# Altium PCB DongleCopy.PcbDoc
Units mm, origin at the board's own origin, x right, y up, seen from the top; angles counter-clockwise.
Board outline 69.72 x 43.31 mm, 2 copper layers (Top Layer, Bottom Layer); 39 components, 34 nets, 175 pads, 43 vias.
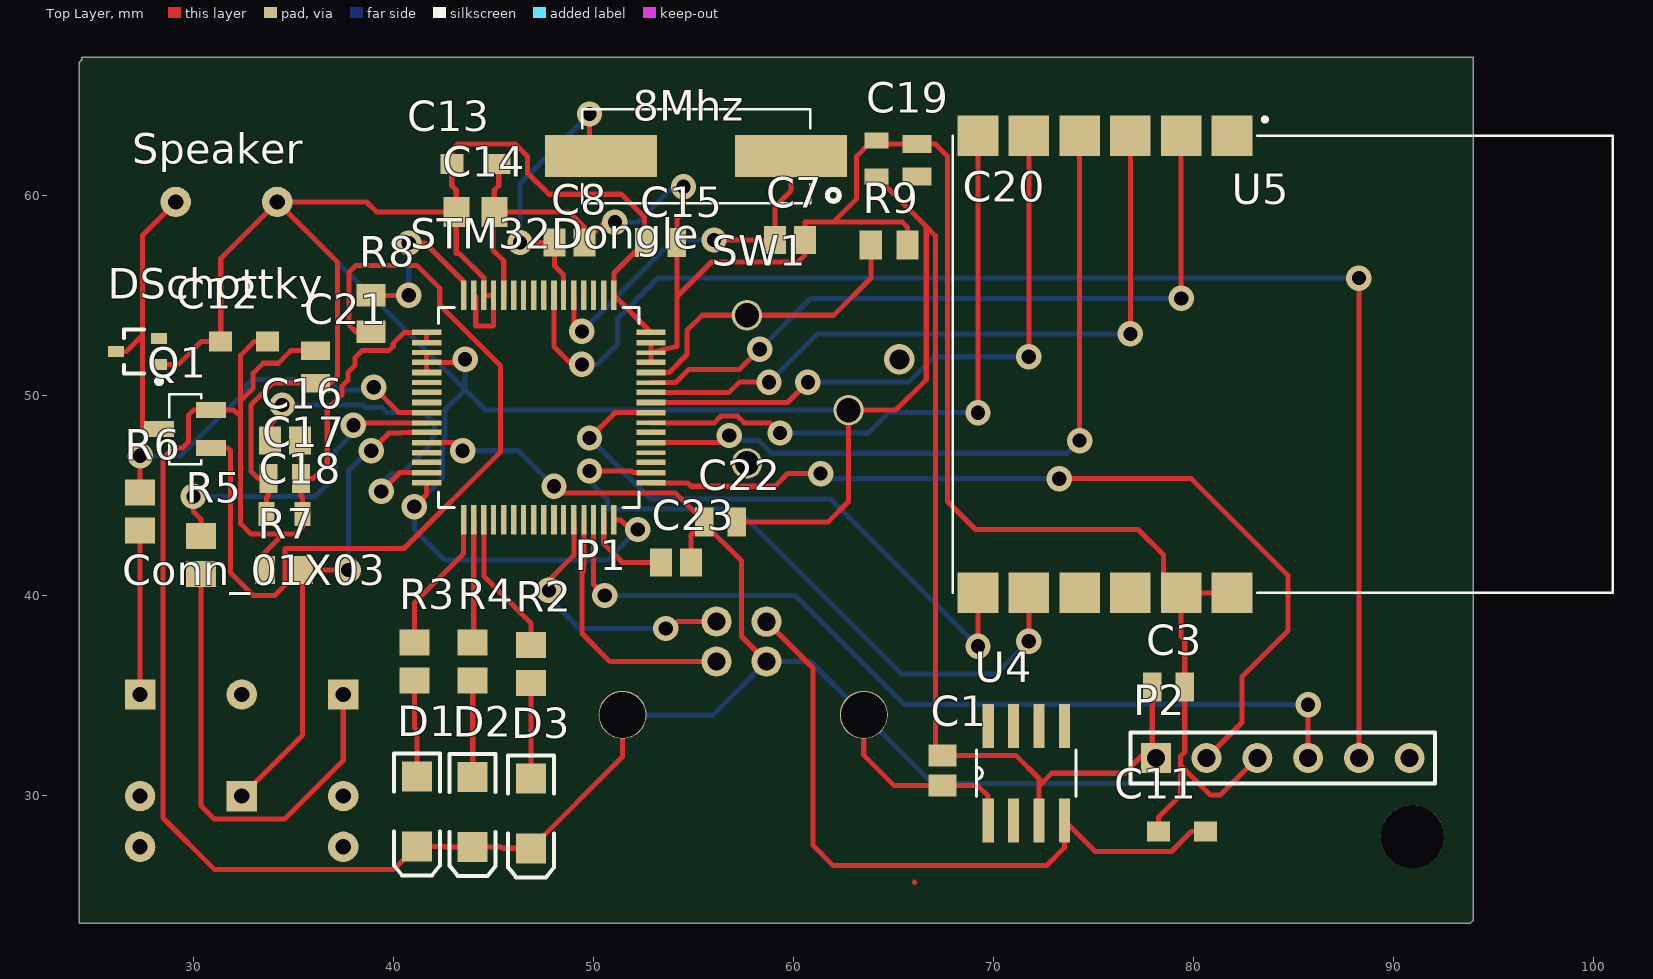
[diagram p0: Top Layer view]
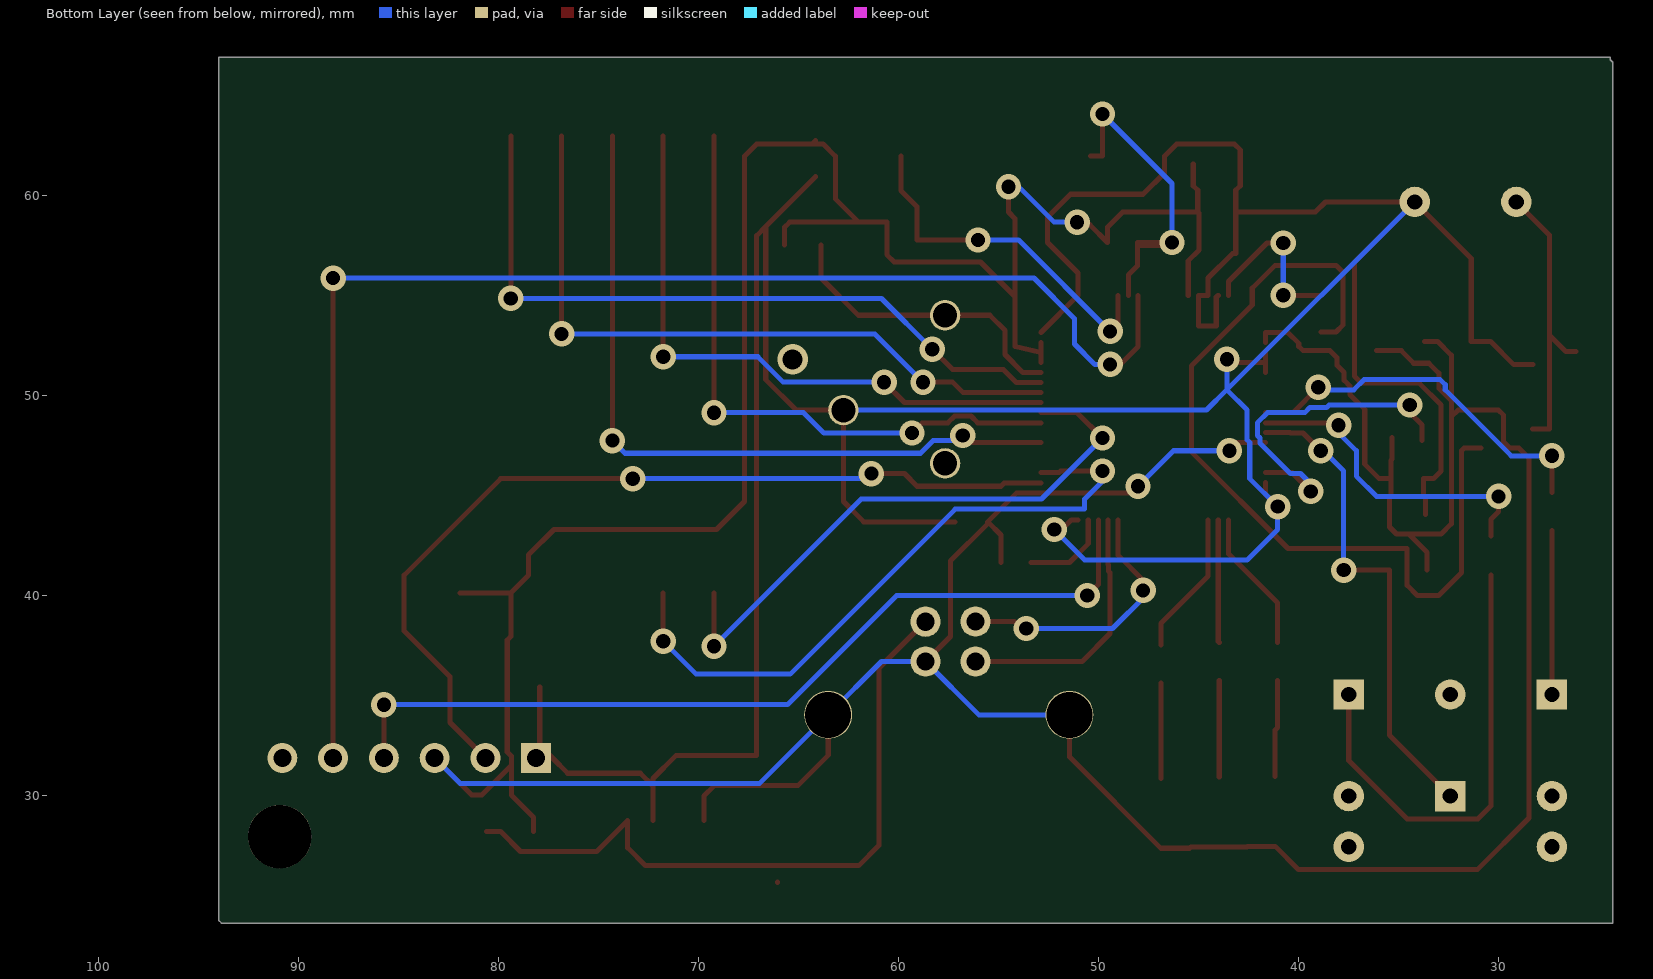
[diagram p1: Bottom Layer view, seen from below]

## Layer stack, top to bottom
Top Solder: solder mask 0.0102, Solder Resist, Dk 3.5
Top Layer: signal copper 0.0356
Dielectric 1: dielectric 0.32, FR-4, Dk 4.8
Bottom Layer: signal copper 0.0356
Bottom Solder: solder mask 0.0102, Solder Resist, Dk 3.5

## Board outline
24.384,66.802 24.257,66.675 24.257,23.622 93.853,23.622 93.98,23.749 93.98,66.929 24.384,66.929

## Design rules (kind name [scope] priority, off if disabled: settings)
Clearance [All] p1: gap=0.215
ComponentClearance [All] p1: gap=0.22 collisioncheckmode=3 verticalgap=0.22 showdistances=TRUE
HoleToHoleClearance [All] p1: gap=0.24 allowstackedmicrovias=TRUE
MinimumSolderMaskSliver [All] p1: minsoldermaskwidth=0.209
PolygonConnect [All] p1: connectstyle=Relief reliefconductorwidth=0.254 reliefentries=4 polygonreliefangle="90 Angle" airgapwidth=0.254
RoutingVias [All] p1: holewidth=0.711 width=1.27 viastyle="Through Hole" minholewidth=0.711 minwidth=1.27 maxholewidth=0.711 maxwidth=1.27
SilkToSilkClearance [All] p1: silktosilkclearance=0.24
SilkToSolderMaskClearance [IsPad] p1: minsilkscreentomaskgap=0.125 clearancetoexposedcopper=TRUE
SolderMaskExpansion [All] p1: expansion=0.102
Width [All] p1: maxlimit=0.254 minlimit=0.254 preferedwidth=0.254
25 further rules are at their usual default settings.

## Components (designator, comment, footprint, x,y, rotation, side; value= is the part's Value field where it differs from the comment)
8Mhz "X1" XTAL_ABLS2-24.000MHZ-D4YF-T 55.118,61.976 r180 top
C1 "Cap Pol3" C0805 67.437,31.242 r270 top
C3 "100nF" CAPC2013X110N 78.74,35.433 r0 top
C7 "15pF" C0805 59.817,57.785 r0 top
C8 "Cap Pol3" C0805 48.78,57.658 r0 top
C11 "1uF" INDC2012X87N 79.407,28.194 r0 top
C12 "1uF" INDC2012X87N 32.512,52.705 r0 top
C13 "1uF" INDC2012X87N 44.069,61.595 r0 top
C14 "10nF" CAPC2012X135N 44.069,59.182 r0 top
C15 "100nf" CAPC2013X110N 53.34,57.658 r0 top
C16 "Cap Pol3" C0805 34.544,47.752 r0 top
C17 "100nF" CAPC2013X110N 34.544,45.847 r0 top
C18 "4.7uF" 0805 34.533,44.069 r0 top
C19 "4.7uF" 0805 64.135,61.849 r90 top
C20 "100nF" CAPC2013X110N 66.167,61.773 r90 top
C21 "100nF" CAPC2013X110N 36.068,51.435 r270 top
C22 "100nF" CAPC2013X110N 56.337,43.688 r180 top
C23 "Cap Pol3" C0805 54.114,41.656 r0 top
Conn_01X03 "K1" PCBComponent_1#1 26.289,25.527 r90 top
D1 "LED2" 3.2X1.6X1.1 41.148,29.21 r270 top
D2 "LED2" 3.2X1.6X1.1 43.942,29.182 r270 top
D3 "LED2" 3.2X1.6X1.1 46.863,29.111 r270 top
DSchottky "D4" SOT65P210X110-3N 27.178,52.197 r180 top
P1 "USB_B" PCBComponent_1#2 43.18,30.226 r0 top
P2 "Header 6" HDR1X6 78.105,31.877 r0 top
Q1 "BC846A-7-F" SOT23-3 29.511,47.971 r90 top
R2 "100R" RESC2012X60 46.863,36.576 r270 top
R3 "100R" RESC2012X60 41.021,36.703 r270 top
R4 "100R" RESC2012X60 43.942,36.703 r270 top
R5 "100ohm" RESC2012X60 30.353,42.037 r270 top
R6 "100ohm" RESC2012X60 27.305,44.196 r270 top
R7 "2.2kr" RESC2013X65N 34.493,41.275 r0 top
R8 "1k" CAPC2012X140N 38.862,54.102 r90 top
R9 "1k" CAPC2012X140N 64.77,57.531 r180 top
Speaker "Speaker" Speaker 36.703,59.69 r180 top
STM32Dongle "U1" QFP50P1200X1200X160-64N 47.244,49.403 r270 top
SW1 "YELSW" PCBComponent_1#3 43.688,44.196 r0 top
U4 "LD1117D33TR" SOIC127P600X175-8N 71.628,31.115 r90 top
U5 "MRF24J40MDT-I/RM" XCVR_MRF24J40MDT-I/RM 75.565,51.562 r270 top

## Footprints (in the part's own frame and the unit in brackets; to place one, negate y for a bottom-side part, rotate by r counter-clockwise, add the part's x,y. Pads: shape width x height; smd on the part's side, far side on the other; paste and mask are expansions set on the pad)
3.2X1.6X1.1 [mm] "SMT LED; 2 Flat Leads"
  rect 1.5x1.5 smd: 1(-1.75,0) 2(1.75,0)
  silkscreen extent -2.9,-1.15 3.2,1.15
0805 [mm]
  rect 0.8x1.2 smd: P1(-0.9,0) P2(0.9,0)
C0805 [mm] "Chip Capacitor, Body 2.0x1.3mm, IPC High Density"
  rect 1.1x1.4 smd: 1(-0.75,0) 2(0.75,0)
  body extent -1.1,-0.72 1.1,0.72, height 1.4
CAPC2012X135N [mm]
  rect 1.3x1.5 smd: 1(-0.95,0) 2(0.95,0)
CAPC2012X140N [mil]
  rect 44x57 smd: 1(-36,0) 2(36,0)
CAPC2013X110N [mil]
  rect 36x57 smd: 1(-32,0) 2(32,0)
HDR1X6 [mm] "Connector; Header; 6 Position"
  rect 1.5x1.5 hole 0.9: 1(0,0)
  round 1.5 hole 0.9: 2(2.54,0) 3(5.08,0) 4(7.62,0) 5(10.16,0) 6(12.7,0)
  silkscreen extent -1.27,-1.27 13.97,1.27
INDC2012X87N [mm]
  rect 1.15x1 smd: 1(-1.175,0) 2(1.175,0)
PCBComponent_1#1 [mil]
  round 60 hole 30: 4(375,-240) 6(175,-440) 7(75,-440) 11(75,-40) 12(175,-40)
  rect 60x60 hole 30: R3(375,-40) S1(175,-240) T2(375,-440)
PCBComponent_1#2 [mil]
  round 60 hole 36.22: 1(608.43,333.62) 2(510,333.74) 3(510,255) 4(608.43,255)
  round 94.49 hole 90.55: 5(325,150) 5(800,150)
  Top Layer lines w10: 900,-179.45 900.28,-179.72
PCBComponent_1#3 [mil]
  round 60 hole 48.03: 1(550,386.73) 3(750,200) 7(550,95)
  round 60 hole 39.37: 10(850,300)
QFP50P1200X1200X160-64N [mil]
  rect 58x11 smd: 1(-221,148) 2(-221,128) 4(-221,89) 5(-221,69) 7(-221,30) 8(-221,10) 9(-221,-10) 11(-221,-49) 12(-221,-69) 14(-221,-108) 15(-221,-128) 16(-221,-148) 33(221,-148) 34(221,-128) 35(221,-108) 37(221,-69) 38(221,-49) 40(221,-10) 41(221,10) 42(221,30) 44(221,69) 47(221,128) 48(221,148)
  rect 58x9.45 smd: 3(-221,108)
  rect 58x10 smd: 6(-221,49) 36(221,-89) 39(221,-30) 43(221,49) 45(221,89) 46(221,108)
  rect 58x9.84 smd: 10(-221,-30) 13(-221,-89)
  rect 11x58 smd: 17(-148,-221) 18(-128,-221) 20(-89,-221) 21(-69,-221) 23(-30,-221) 24(-10,-221) 25(10,-221) 27(49,-221) 28(69,-221) 30(108,-221) 31(128,-221) 32(148,-221) 49(148,221) 50(128,221) 51(108,221) 53(69,221) 54(49,221) 56(10,221) 57(-10,221) 58(-30,221) 60(-69,221) 61(-89,221) 63(-128,221) 64(-148,221)
  rect 9.84x58 smd: 19(-108,-221) 22(-49,-221)
  rect 10x58 smd: 26(30,-221) 29(89,-221)
  rect 9.45x58 smd: 52(89,221) 59(-49,221) 62(-108,221)
  rect 9.06x58 smd: 55(30,221)
  silkscreen extent -197,-197 197,197
RESC2012X60 [mm]
  rect 1.3x1.5 smd: 1(-0.95,0) 2(0.95,0)
RESC2013X65N [mil]
  rect 40x55 smd: 1(-37,0) 2(37,0)
SOIC127P600X175-8N [mil]
  rect 86x22 smd: 1(-93,75) 2(-93,25) 3(-93,-25) 4(-93,-75) 5(93,-75) 6(93,-25) 7(93,25) 8(93,75)
  silkscreen extent -46,-98 46,99
SOT23-3 [mm]
  rect 0.8x1.5 smd: 1(-0.6,-1.35) 2(1.3,-1.35) 3(0.35,1.25)
  silkscreen extent -1.4,-0.85 2.1,0.75
SOT65P210X110-3N [mm] "SOT23, 3-Leads, Body 2.00x2.10mm, Pitch 0.65mm, IPC Medium Density"
  rect 0.8x0.55 smd: 1(-1.075,0.65) 2(-1.075,-0.65) 3(1.075,0)
  silkscreen extent -1.2,-1.1 0.67,1.6, body extent -0.67,-1.1 0.67,1.1, height 1.1
Speaker [mil]
  round 60 hole 30: 1(100,0) 2(300,0)
XCVR_MRF24J40MDT-I/RM [mil]
  rect 80x80 smd: 1(-450,250) 2(-450,150) 3(-450,50) 4(-450,-50) 5(-450,-150) 6(-450,-250) 7(450,-250) 8(450,-150) 9(450,-50) 10(450,50) 11(450,150) 12(450,250)
  silkscreen extent -486,-300 450,1000
XTAL_ABLS2-24.000MHZ-D4YF-T [mm]
  rect 5.6x2.1 smd: 1(-4.75,0) 2(4.75,0)
  silkscreen extent -7.15,-2.35 5.7,2.35

## Part data
8Mhz: library part 8Mhz
C1 C8 C16 C23: "Polarized Capacitor (Surface Mount)"
C3 C15 C17 C20 C21 C22: library part C0805C104K5RACTU, "Capacitor; Ceramic; Cap; .100UF ; Tol+-10%; SMD; Vol-Rtg 50V; X7R, Tape/Reel"
C7: library part "Cap Pol3", "Polarized Capacitor (Surface Mount)"
C11 C12 C13: library part C2012X5R1E105M085AC, "CAP CER 1UF 25V X5R 0805"
C14: library part GRM216R71H103KA01D, "CAP CER 10000PF 50V X7R 0805"
Conn_01X03: library part Conn_01X03
D1 D2 D3: "Typical RED, GREEN, YELLOW, AMBER GaAs LED"
DSchottky: library part DSchottky
P1 Speaker: library part Component_1
P2: "Header, 6-Pin"
Q1: "TRANS NPN 65V 0.1A SOT23-3"
R2 R3 R4 R5 R6: library part RC0805FR-07100RL, "RES SMD 100 OHM 1% 1/8W 0805"
R7: library part RC0805FR-072K2L, "RES SMD 2.2K OHM 1% 1/8W 0805"
R8 R9: library part 1kohm, "1276-5272-1-ND"
STM32Dongle: library part STM32Dongle, "497-11907-ND"
U4: "IC REG LINEAR 3.3V 800MA 8SO"
U5: "2.4 GHz IEEE 802.15.4 Certified Transceiver Module (+20 dBm), 12 MODULE Varies T/R"

## Free pads (board coordinates)
  round 3.175 hole 3.175 unplated: 2(90.932,27.94)

## Via types
v1: diameter 1.27, hole 0.711, Top Layer to Bottom Layer, 43 vias

## Nets (pads, with @x,y where several pads share a name; then routed paths per layer and width w, separated by ;. In a path a pad name is that pad's centre, name@x,y a point inside that pad or via, vN(x,y) a via of type N, cw(c..) or ccw(c..) an arc to the next point about the centre after c; other vN are vias at no path point)
3.3V: C1.1 C3.1 C12.1 C13.1 C14.1 C15.1 C17.1 C18.P1 C19.P1 C21.2 C22.1 DSchottky.1 P2.1 Speaker.1 STM32Dongle.1 STM32Dongle.13 STM32Dongle.14 STM32Dongle.15 STM32Dongle.19 STM32Dongle.20 STM32Dongle.21 STM32Dongle.32 STM32Dongle.48 STM32Dongle.64 SW1.3 U4.3 | length 203.8
  Top Layer w0.254: DSchottky.1 29.21,51.547 30.368,52.705 C12.1 31.337,56.864 Speaker.1 ; C18.P1 33.633,44.907 33.731,45.005 C17.1 33.223,45.847 32.842,46.228 32.842,49.53 33.934,50.622 C21.2 36.83,50.622 37.186,50.978 37.186,56.667 Speaker.1 ; v1@41.148,44.577 41.631,45.06 STM32Dongle.32 ; STM32Dongle.21 STM32Dongle.20 ; STM32Dongle.19 STM32Dongle.20 ; v1@43.129,51.664 STM32Dongle.20 ; STM32Dongle.15 44.005,55.016 44.094,54.927 44.094,53.492 44.983,53.492 STM32Dongle.13 STM32Dongle.14 44.501,55.88 43.282,57.099 43.119,57.099 C14.1 ; STM32Dongle.48 51.333,43.79 v1@51.689,43.434 ; STM32Dongle.64 STM32Dongle.1 51.003,56.134 C15.1 52.527,58.928 51.384,60.071 47.752,60.071 46.685,61.138 46.685,61.976 46.082,62.579 43.18,62.579 42.894,62.293 C13.1 42.894,60.499 43.119,60.274 C14.1 ; C22.1 61.722,43.688 62.738,44.704 SW1.3 65.1,49.276 66.624,50.8 66.624,58.46 ; C19.P1 66.624,58.46 ; U4.3 72.263,30.48 ; C3.1 77.927,32.512 77.292,31.877 ; P2.1 77.292,31.877 ; Speaker.1 38.633,59.69 39.141,59.182 C14.1 ; 66.624,58.46 67.081,58.003 67.081,31.992 C1.1 71.12,31.992 72.263,30.849 72.263,30.48 ; 72.263,30.48 72.898,31.115 76.53,31.115 77.292,31.877
  Bottom Layer w0.254: Speaker.1 43.561,50.292 ; v1(43.561,51.816) 43.561,50.292 ; v1(52.197,43.307) 50.673,41.783 42.545,41.783 41.021,43.307 v1(41.021,44.45) 42.418,45.847 42.418,47.665 42.545,47.792 42.545,49.276 43.561,50.292 ; SW1.3 44.577,49.276 43.561,50.292
5V: C11.2 P1.1 U4.4 | length 35
  Top Layer w0.254: P1.1 60.96,36.374 60.96,27.508 61.976,26.492 72.644,26.492 73.533,27.381 U4.4 75.082,27.203 78.892,27.203 79.883,28.194 C11.2
GND: C1.2 C3.2 C7.2 C8.2 C11.1 C12.2 C13.2 C14.2 C15.2 C16.2 C17.2 C18.P2 C19.P2 C20.2 C21.1 C22.2 C23.2 D1.2 D2.2 D3.2 P1.4 P1.5 P2.3 Q1.2 R7.1 R9.1 STM32Dongle.12 STM32Dongle.17 STM32Dongle.18 STM32Dongle.28 STM32Dongle.61 STM32Dongle.62 STM32Dongle.63 U4.1 U5.11 U5.12 | length 265.9
  Top Layer w0.254: 32.334,49.754 32.334,52.019 33.02,52.705 C12.2 ; R7.1 33.553,42.164 34.468,43.078 ; C16.2@35.294,47.904 C16.2 35.294,46.824 35.357,46.761 C17.2 ; C21.1 34.842,52.248 34.215,51.621 33.46,51.621 32.961,51.122 32.961,50.367 32.334,49.74 32.334,48.941 ; STM32Dongle.28 43.028,47.65 v1(43.434,47.244) ; STM32Dongle.18 STM32Dongle.17 40.513,53.162 39.967,52.616 39.967,52.471 39.744,52.248 38.405,52.248 38.052,51.895 38.052,51.514 37.694,51.156 37.694,50.767 37.398,50.472 37.398,50.048 36.665,49.314 36.665,46.571 35.941,45.847 C17.2 ; C13.2 45.244,60.499 45.019,60.274 C14.2 ; STM32Dongle.12 45.491,56.744 44.958,57.277 44.958,59.121 C14.2 ; v1(48.006,45.466) 48.349,45.123 54.089,45.123 C22.2 ; 50.419,58.547 C8.2 49.53,58.42 48.768,59.182 C14.2 ; P1.5@51.435,34.036 51.435,31.933 D3.2 45.435,27.361 45.364,27.432 D2.2 42.548,27.432 42.52,27.46 D1.2 39.977,26.289 31.039,26.289 28.448,28.88 28.448,46.863 28.956,47.371 29.4,47.371 29.718,47.688 29.718,49.017 29.972,49.271 Q1.2 32.004,49.271 32.334,48.941 ; STM32Dongle.61 STM32Dongle.62 ; STM32Dongle.63 STM32Dongle.62 ; v1(54.483,60.452) 54.483,59.182 54.153,58.852 C15.2 54.153,54.954 ; C23.2 54.864,43.028 C22.2 ; P1.4 57.379,37.958 57.379,41.739 55.524,43.594 C22.2 ; P1.5@63.5,34.036 63.5,32.016 65.024,30.492 C1.2 69.203,30.492 69.723,29.972 U4.1 ; C19.P2 C19.P2@64.298,62.586 ; R9.1 65.684,58.42 65.43,58.674 61.976,58.674 ; C11.1 78.232,28.905 79.35,30.023 79.35,31.496 ; U5.12 U5.11 ; P2.3 81.331,30.023 80.823,30.023 79.35,31.496 ; 32.334,48.941 32.334,43.586 32.842,43.078 34.468,43.078 ; 34.468,43.078 35.077,43.078 35.433,43.434 C18.P2 35.433,44.907 35.357,44.983 C17.2 ; STM32Dongle.62 54.153,52.451 54.153,54.954 ; 54.153,54.954 55.88,56.681 60.198,56.681 60.567,57.05 C7.2 60.567,58.674 61.976,58.674 ; 61.976,58.674 63.144,59.842 63.144,61.976 63.754,62.586 C19.P2@64.298,62.586 ; C19.P2@64.298,62.586 C20.2 67.081,62.586 67.691,61.976 67.691,44.704 69.088,43.307 77.216,43.307 78.486,42.037 78.486,41.021 U5.11 ; 79.35,31.496 79.35,31.979 79.553,32.182 C3.2 79.553,37.77 79.375,37.948 U5.11
  Bottom Layer w0.254: v1(43.434,47.244) 46.228,47.244 v1(48.006,45.466) ; v1(51.054,58.674) 52.197,58.674 53.848,60.325 ; P1.5@51.435,34.036 55.967,34.036 P1.4 60.833,36.703 63.5,34.036 66.929,30.607 81.915,30.607 P2.3
Net8Mhz_1: 8Mhz.1 C7.1 STM32Dongle.5 | length 18.1
  Top Layer w0.254: STM32Dongle.5 48.997,53.619 v1(49.403,53.213) ; v1(56.007,57.785) C7.1 59.067,59.461 59.868,60.262 8Mhz.1
  Bottom Layer w0.254: v1(49.403,53.213) 53.975,57.785 v1(56.007,57.785)
Net8Mhz_2: 8Mhz.2 C8.1 STM32Dongle.6 | length 17
  Top Layer w0.254: v1@46.304,57.506 C8.1@48.03,57.506 ; v1(46.304,57.658) C8.1 C8.1@48.03,57.506 ; STM32Dongle.6 48.489,56.032 48.03,56.491 C8.1@48.03,57.506 ; v1(49.784,64.084) 49.784,61.976 8Mhz.2
  Bottom Layer w0.254: v1@46.304,57.506 v1(46.304,57.658) 46.304,60.604 v1(49.784,64.084)
NetC16_1: C16.1 STM32Dongle.31 | length 16.9
  Top Layer w0.254: C16.1 33.794,48.526 v1@34.417,49.149 ; v1(39.37,45.212) 40.31,46.152 STM32Dongle.31
  Bottom Layer w0.254: v1(34.417,49.53) 38.441,49.53 38.568,49.403 39.41,49.403 39.664,49.149 41.529,49.149 42.037,48.641 42.037,48.002 41.91,47.875 41.91,47.625 40.386,46.101 39.878,46.101 v1@39.243,45.466
NetC23_1: C23.1 STM32Dongle.47 | length 4.5
  Top Layer w0.254: STM32Dongle.47 50.495,42.596 51.435,41.656 C23.1
NetConn_01X03_R3: Conn_01X03.R3 R6.2 | length 8.2
  Top Layer w0.254: Conn_01X03.R3 R6.2
NetConn_01X03_S1: Conn_01X03.S1 R7.2 STM32Dongle.27 | length 24.2
  Top Layer w0.254: Conn_01X03.S1 35.433,33.02 R7.2 v1(37.719,41.275) ; v1(38.862,47.244) 39.751,48.133 40.386,48.133 40.411,48.158 STM32Dongle.27
  Bottom Layer w0.254: v1(37.719,41.275) 37.719,46.228 v1@38.608,47.117
NetConn_01X03_T2: Conn_01X03.T2 R5.2 | length 23.4
  Top Layer w0.254: R5.2@30.353,41.021 30.353,29.489 31.013,28.829 34.544,28.829 37.465,31.75 Conn_01X03.T2
NetD1_1: D1.1 R3.2 | length 4.8
  Top Layer w0.254: R3.2 41.021,33.401 41.148,33.274 D1.1
NetD2_1: D2.1 R4.2 | length 4.8
  Top Layer w0.254: D2.1 R4.2
NetD3_1: D3.1 R2.2 | length 4.8
  Top Layer w0.254: D3.1 R2.2
NetDSchottky_3: DSchottky.3 Q1.3 Speaker.2 | length 14.6
  Top Layer w0.254: DSchottky.3 26.594,52.197 27.432,53.035 ; Q1.3 27.432,48.321 27.432,53.035 ; Speaker.2 27.432,58.039 27.432,53.035
NetP1_2: P1.2 STM32Dongle.44 | length 13.3
  Top Layer w0.254: v1(47.752,40.259) 47.752,40.767 48.997,42.012 STM32Dongle.44 ; v1@53.721,38.227 54.197,38.703 P1.2
  Bottom Layer w0.254: v1@47.625,40.005 49.276,38.354 v1(53.594,38.354)
NetP1_3: P1.3 STM32Dongle.45 | length 13
  Top Layer w0.254: STM32Dongle.45 49.505,41.554 49.479,41.529 49.479,41.224 49.403,41.148 49.403,38.1 50.8,36.703 P1.3
NetQ1_1: Q1.1 R8.1 | length 43.6
  Top Layer w0.254: Q1.1 31.699,47.371 31.826,47.244 31.826,41.148 32.969,40.005 34.036,40.005 34.544,40.513 34.544,42.355 40.5,42.355 45.339,47.193 45.339,51.486 42.291,54.534 42.291,55.372 41.148,56.515 38.1,56.515 37.744,56.159 37.744,53.543 38.1,53.188 R8.1
NetR2_1: R2.1 STM32Dongle.35 | length 7.2
  Top Layer w0.254: STM32Dongle.35 44.501,40.97 46.863,38.608 R2.1
NetR3_1: R3.1 STM32Dongle.33 | length 7.2
  Top Layer w0.254: R3.1 41.021,39.624 43.472,42.075 STM32Dongle.33@43.472,43.79
NetR4_1: R4.1 STM32Dongle.34 | length 6.2
  Top Layer w0.254: R4.1 43.993,37.704 STM32Dongle.34
NetR5_1: R5.1 STM32Dongle.26 | length 16.2
  Top Layer w0.254: v1@29.972,44.704 29.972,44.196 30.353,43.815 R5.1 ; v1(37.973,48.514) 38.1,48.641 STM32Dongle.26
  Bottom Layer w0.254: v1(29.972,44.958) 36.068,44.958 37.084,45.974 37.084,47.244 v1@38.354,48.514
NetR6_1: R6.1 STM32Dongle.25 | length 18.1
  Top Layer w0.254: R6.1 v1@27.305,46.736 ; v1(38.989,50.419) 40.259,49.149 STM32Dongle.25
  Bottom Layer w0.254: v1(27.305,46.99) 29.337,46.99 32.639,50.292 32.639,50.546 32.893,50.8 36.703,50.8 37.211,50.292 v1@38.735,50.292
NetR8_2: R8.2 STM32Dongle.16 | length 8.7
  Top Layer w0.254: R8.2 v1(40.742,55.016) ; v1(40.742,57.633) 41.554,57.633 43.474,55.713 STM32Dongle.16@43.474,55.016
  Bottom Layer w0.254: v1(40.742,55.016) v1(40.742,57.633)
NetR9_2: R9.2 STM32Dongle.60 SW1.1 | length 15.3
  Top Layer w0.254: STM32Dongle.60 53.765,51.156 54.661,52.052 54.661,53.264 55.416,54.019 SW1.1 61.995,54.019 63.856,55.88 R9.2
NetSTM32Dongle_50: STM32Dongle.50 U5.8 | length 32.5
  Top Layer w0.254: v1(49.784,46.228) 51.874,46.228 51.95,46.152 STM32Dongle.50 ; v1(71.755,37.719) U5.8
  Bottom Layer w0.254: v1@49.784,45.72 50.673,44.831 50.673,44.323 57.15,44.323 65.405,36.068 70.104,36.068 v1(71.755,37.719)
NetSTM32Dongle_53: STM32Dongle.53 U5.4 | length 36.8
  Top Layer w0.254: STM32Dongle.53 v1@56.286,47.65 ; v1(74.295,47.752) U5.4
  Bottom Layer w0.254: v1(56.769,48.006) 57.023,47.752 58.253,47.752 58.888,47.117 73.66,47.117 v1(74.295,47.752)
NetSTM32Dongle_55: STM32Dongle.55 U5.6 | length 31.1
  Top Layer w0.254: STM32Dongle.55 56.022,48.641 56.364,48.983 57.174,48.983 57.516,48.641 58.801,48.641 v1(59.309,48.133) ; v1(69.215,49.149) U5.6
  Bottom Layer w0.254: v1(59.309,48.133) 63.719,48.133 64.735,49.149 v1(69.215,49.149)
NetSTM32Dongle_56: STM32Dongle.56 U5.7 | length 30
  Top Layer w0.254: v1(49.784,47.879) 51.054,49.149 STM32Dongle.56 ; v1(69.215,37.465) U5.7
  Bottom Layer w0.254: v1(49.784,47.879) 52.832,44.831 61.849,44.831 v1(69.215,37.465)
NetSTM32Dongle_57: STM32Dongle.57 U5.5 | length 30.9
  Top Layer w0.254: STM32Dongle.57 59.69,49.657 v1(60.706,50.673) ; v1(71.755,51.943) U5.5
  Bottom Layer w0.254: v1(60.706,50.673) 65.751,50.673 67.021,51.943 v1(71.755,51.943)
NetSTM32Dongle_58: STM32Dongle.58 U5.3 | length 35.1
  Top Layer w0.254: STM32Dongle.58 56.769,50.165 57.277,50.673 v1(58.761,50.673) ; v1(76.835,53.086) U5.3
  Bottom Layer w0.254: v1(58.761,50.673) 61.174,53.086 v1(76.835,53.086)
NetSTM32Dongle_59: STM32Dongle.59 U5.2 | length 36.4
  Top Layer w0.254: STM32Dongle.59 54.084,50.648 54.744,51.308 57.277,51.308 v1(58.293,52.324) ; v1(79.375,54.864) U5.2
  Bottom Layer w0.254: v1(58.293,52.324) 60.833,54.864 v1(79.375,54.864)
NRST: P2.5 STM32Dongle.7 | length 69.5
  Top Layer w0.254: STM32Dongle.7 48.006,52.451 48.895,51.562 v1(49.403,51.562) ; P2.5 v1(88.265,55.88)
  Bottom Layer w0.254: v1@49.657,51.562 50.165,51.562 51.181,52.578 51.181,53.848 53.213,55.88 v1(88.265,55.88)
SWCLK: P2.2 STM32Dongle.49 | length 44.8
  Top Layer w0.254: STM32Dongle.49@52.857,45.631 54.699,45.631 54.864,45.466 59.055,45.466 59.69,46.101 v1(61.341,46.101) ; v1(73.279,45.847) 79.883,45.847 84.709,41.021 84.709,38.227 82.423,35.941 82.423,33.655 P2.2
  Bottom Layer w0.254: v1@61.595,45.847 v1(73.279,45.847)
SWDIO: P2.4 STM32Dongle.46 | length 44.1
  Top Layer w0.254: STM32Dongle.46 49.987,40.564 v1(50.546,40.005) ; P2.4 v1(85.725,34.544)
  Bottom Layer w0.254: v1(50.546,40.005) 60.071,40.005 65.532,34.544 v1(85.725,34.544)
pads on no net: C20.1 Conn_01X03.4 Conn_01X03.6 Conn_01X03.7 Conn_01X03.11 Conn_01X03.12 DSchottky.2 P2.6 STM32Dongle.2 STM32Dongle.3 STM32Dongle.4 STM32Dongle.8 STM32Dongle.9 STM32Dongle.10 STM32Dongle.11 STM32Dongle.22 STM32Dongle.23 STM32Dongle.24 STM32Dongle.29 STM32Dongle.30 STM32Dongle.36 STM32Dongle.37 STM32Dongle.38 STM32Dongle.39 STM32Dongle.40 STM32Dongle.41 STM32Dongle.42 STM32Dongle.43 STM32Dongle.51 STM32Dongle.52 STM32Dongle.54 SW1.7 SW1.10 U4.2 U4.5 U4.6 U4.7 U4.8 U5.1 U5.9 U5.10

## Silkscreen, mask and mechanical layers (free items; w line width, h text height)
Mechanical 1:
  circle w0.254: c52.705,54.864 r0.402
  lines w0.254: 25.019,24.257 25.019,66.421 93.472,66.421 93.472,24.13 25.146,24.13

## Text inside footprints (layer, text, board x,y; h text height)
U5: Mechanical 1 "PCB EDGE" at 91.846,62.752 h1.88 r270